# Altium PCB diapers1.PcbDoc
Units mil, origin at the board's own origin, x right, y up, seen from the top; angles counter-clockwise.
Board outline 1011.01 x 1010.52 mil, 2 copper layers (Top Layer, Bottom Layer); 32 components, 19 nets, 115 pads, 51 vias.
Unrouted connection lines stored in the file: 24.
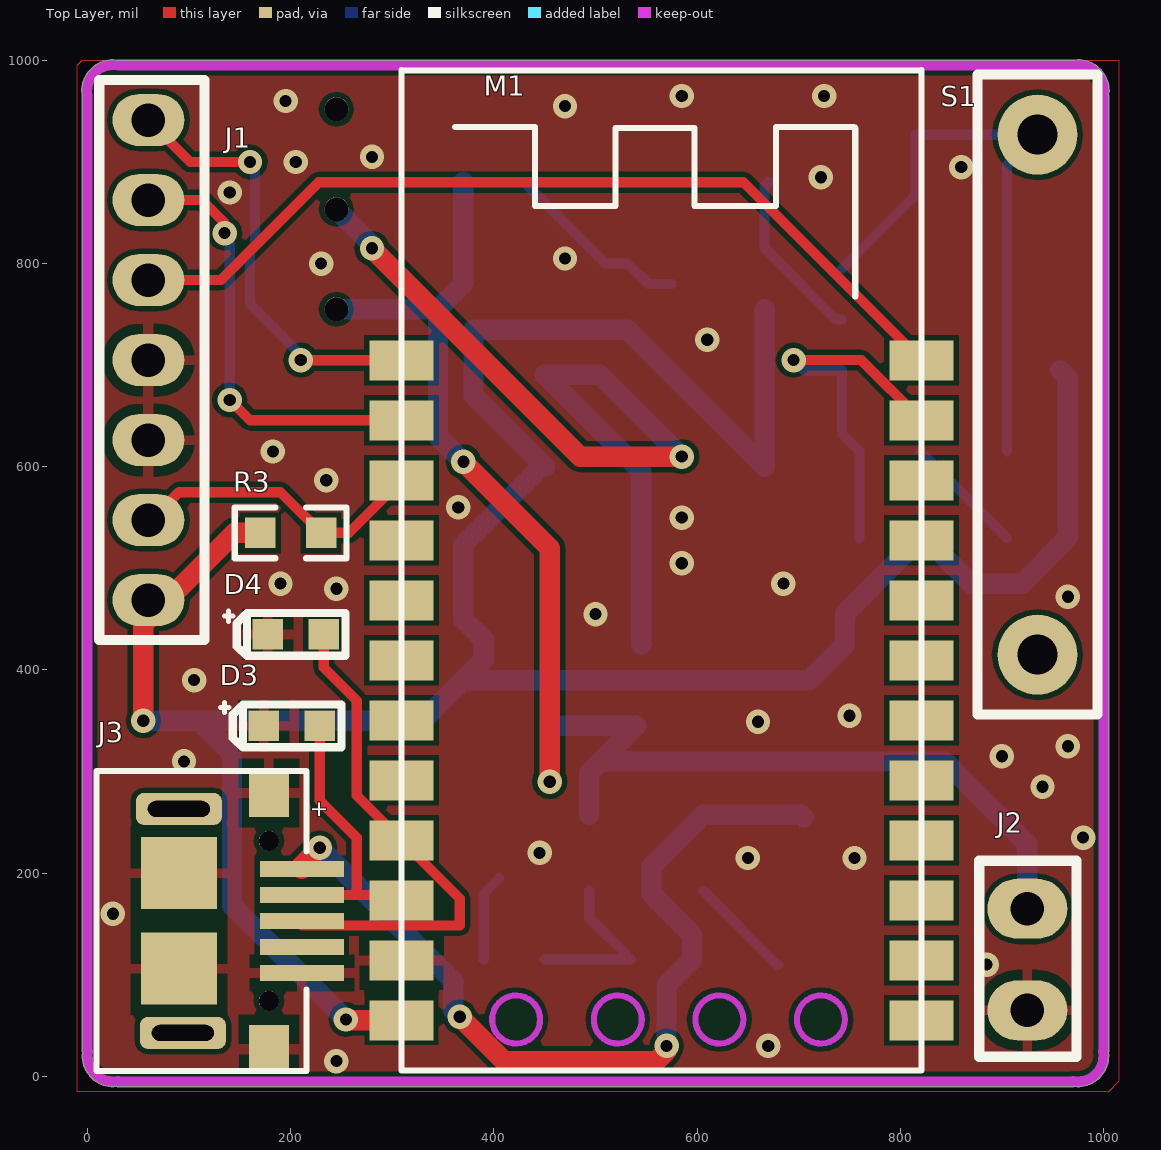
[diagram p0: Top Layer view]
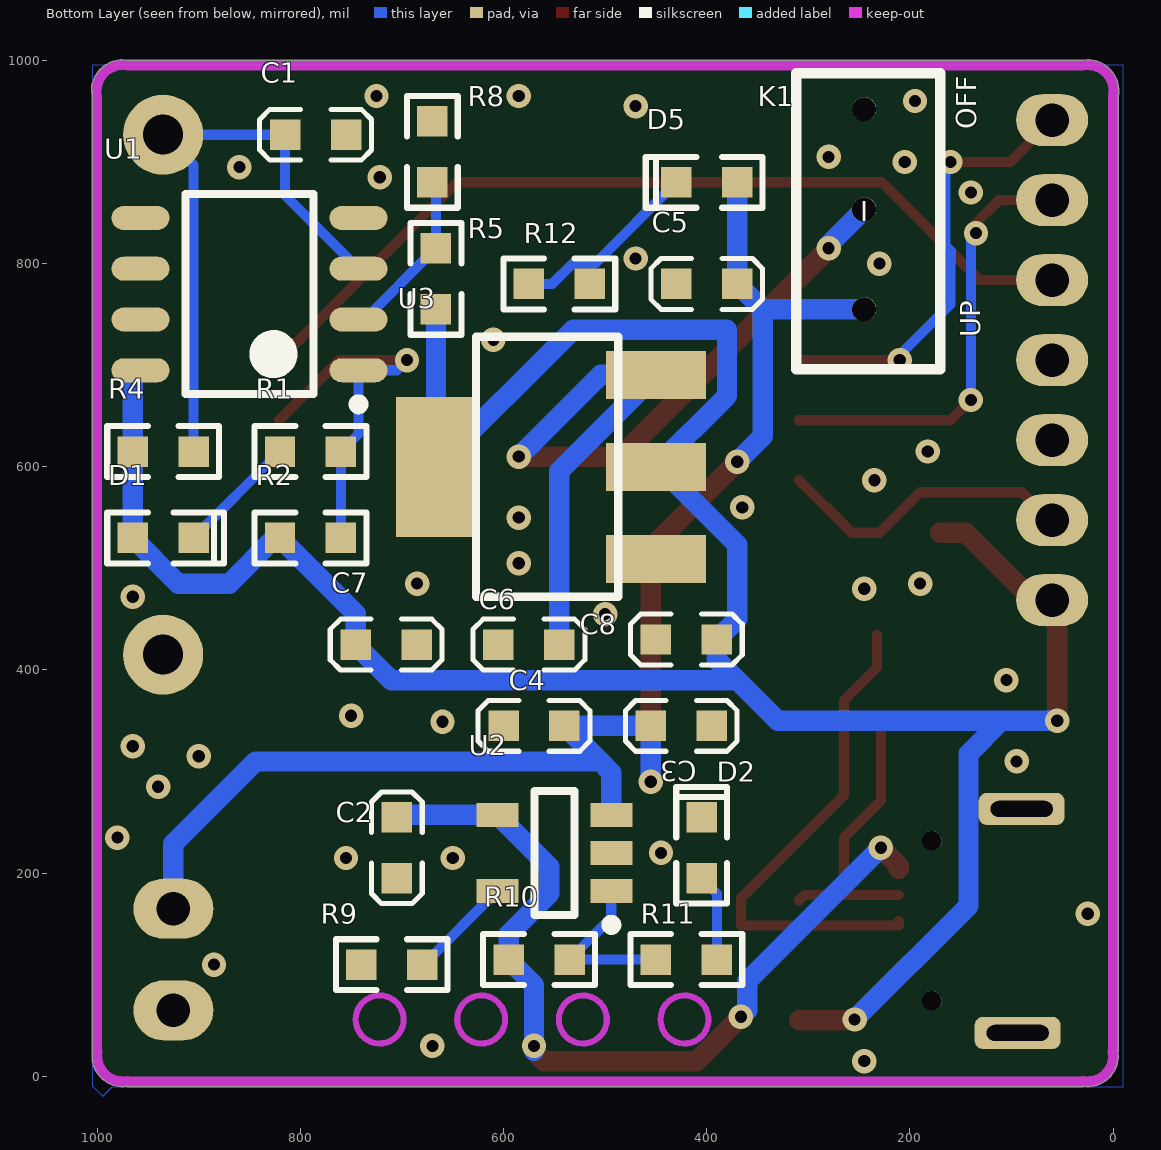
[diagram p1: Bottom Layer view, seen from below]
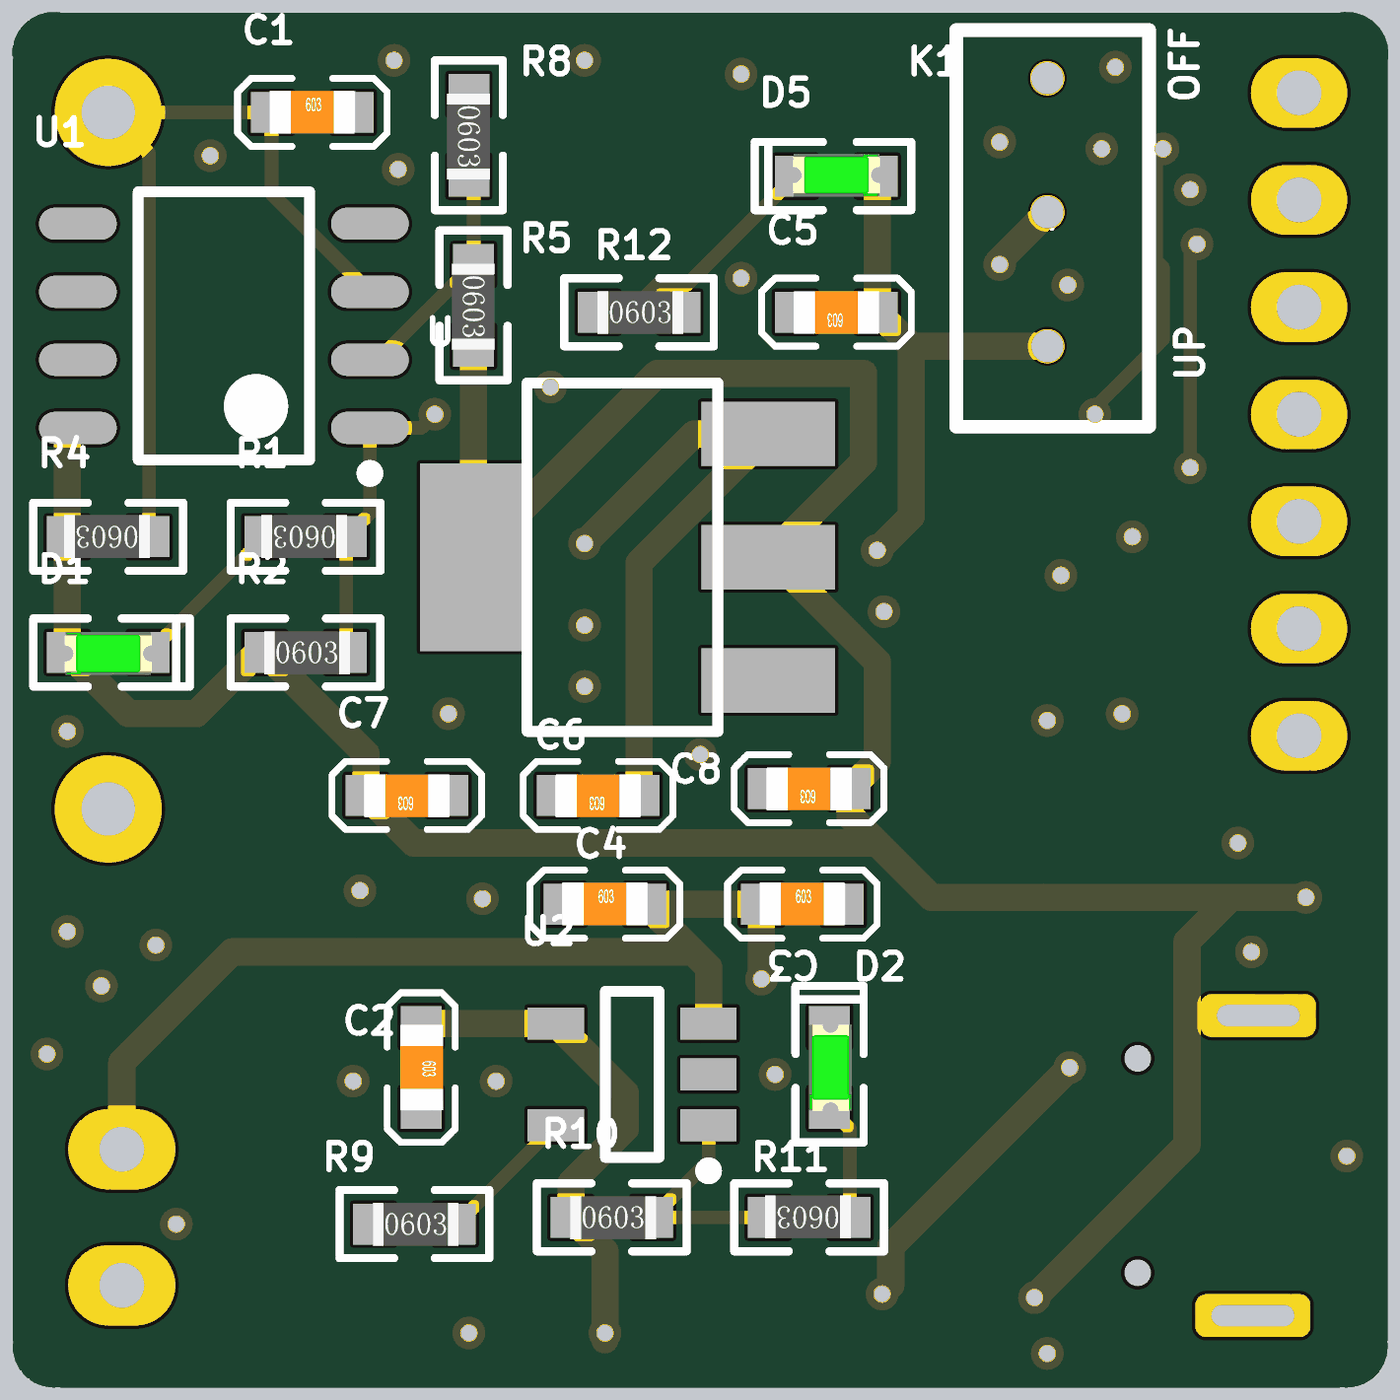
[diagram p2: 3D render of the assembled board from below, using the file's embedded part models]

## Layer stack, top to bottom
Top Solder: solder mask 0.4, Solder Resist, Dk 3.5
Top Layer: signal copper 1.4
Dielectric 1: dielectric 12.6, FR-4, Dk 4.8
Bottom Layer: signal copper 1.4
Bottom Solder: solder mask 0.4, Solder Resist, Dk 3.5

## Board outline
28.56,-9.8 cw(c25,20) -4.8,23.56 cw(c0,25) -5.02,25 -5.02,964.53 cw(c25,970) 30.47,1000.01 969.53,1000.01 cw(c975,970) 1005.51,970 cw(c1000.5,970) 1004.57,967.07 cw(c1000,965) 1005.01,965 1005.01,25 cw(c1000,25) 1004.8,23.56 cw(c975,20) 1005.01,20 cw(c975,20) 971.44,-9.8 cw(c970,-5) 970,-10.01 30,-10.01 cw(c30,-5)

## Design rules (kind name [scope] priority, off if disabled: settings)
Clearance [All] p1: gap=5 ignorepadtopadclearanceinfootprint=FALSE
PolygonConnect PolygonConnect_1 [IsVia] p1: connectstyle=Direct reliefconductorwidth=10 reliefentries=4 polygonreliefangle="90 Angle" airgapwidth=10
PolygonConnect [All] p2: connectstyle=Relief reliefconductorwidth=10 reliefentries=4 polygonreliefangle="90 Angle" airgapwidth=10
RoutingVias [All] p1: holewidth=28 width=50 viastyle="Through Hole" minholewidth=28 minwidth=50 maxholewidth=28 maxwidth=50
SolderMaskExpansion [All] p1: expansion=2.5
Width pow [InNetClass('pow')] p1: maxlimit=60 minlimit=15 preferedwidth=20
Width [All] p2: maxlimit=10 minlimit=10 preferedwidth=10
30 further rules are at their usual default settings.

## Classes and differential pairs
net class pow: +3.3V BT2 VBUS VIN

## Components (designator, comment, footprint, x,y, rotation, side; value= is the part's Value field where it differs from the comment)
C1 "104K50V" C0603 815,926.81 r180 bottom
C2 "475K16V" C0603 705,255 r270 bottom
C3 "106K50V" C0603 455,345 r180 bottom
C4 "104K50V" C0603 600,345 r180 bottom
C5 "106K50V" C0603 370,780 r0 bottom
C6 "104K50V" C0603 545,425 r0 bottom
C7 "106K50V" C0603 685.53,425 r0 bottom
C8 "104K50V" C0603 390,430 r0 bottom
D1 "LED0603G" D-LED0603G 965,530 r180 bottom
D2 "LED0603G" D-LED0603G 405,195 r90 bottom
D3 "ESDA_TR1/0603" HS_0603D 201.06,345 r0 top
D4 "ESDA_TR1/0603" HS_0603D 205,435 r0 top
D5 "LED0603G（NC）" D-LED0603G 370,880 r0 bottom
J1 "J-D2.0-1*7" D-2.0-1*7 60,468.78 r90 top
J2 "J-D2.54-1*2" D2.54-1*2P 925,165 r270 top
J3 "USB-MINI-SOCKET" "MICRO-USB - 5.9" 211.06,204.17 r270 top
K1 "SS-12D00" SS-12D00 245,951.85 r270 bottom
M1 "cc2540" CC25XXSM 565,380 r0 top
R1 "1KF" R0603 760,615 r0 bottom
R2 "10KF" R0603 820,530 r180 bottom
R3 "4.7KF(NC)" R0603 230,535 r180 top
R4 "10KF" R0603 905,615 r0 bottom
R5 "5KF" R0603 666.54,815 r270 bottom
R8 "5KF" R0603 670,940 r270 bottom
R9 "R0603-15KF" R0603 740,110 r180 bottom
R10 "470RF" R0603 595,115 r180 bottom
R11 "470RF" R0603 390,115 r0 bottom
R12 "1KF(NC)" R0603 575,780 r180 bottom
S1 "sw420" sw420 935,926.81 r270 top
U1 "LM393-DR" LM393 850,770 r0 bottom
U2 "MCP73831" SOT23-5N 550,220 r0 bottom
U3 "AMS1117_3.3V" SOT-223 450,600 r90 bottom

## Footprints (in the part's own frame and the unit in brackets; to place one, negate y for a bottom-side part, rotate by r counter-clockwise, add the part's x,y. Pads: shape width x height; smd on the part's side, far side on the other; paste and mask are expansions set on the pad)
C0603 [mil]
  rect 30x30 smd: 1(0,0) 2(60,0)
  silkscreen extent -25,-25 85,25, body extent -1,-15 61,16, height 12
CC25XXSM [mm]
  rect 1.6x1 smd: 1(-6.5,8.25) 2(-6.5,6.75) 3(-6.5,5.25) 4(-6.5,3.75) 5(-6.5,2.25) 6(-6.5,0.75) 7(-6.5,-0.75) 8(-6.5,-2.25) 9(-6.5,-3.75) 10(-6.5,-5.25) 11(-6.5,-6.75) 12(-6.5,-8.25) 13(6.5,-8.25) 14(6.5,-6.75) 15(6.5,-5.25) 16(6.5,-3.75) 17(6.5,-2.25) 18(6.5,-0.75) 19(6.5,0.75) 20(6.5,2.25) 21(6.5,3.75) 22(6.5,5.25) 23(6.5,6.75) 24(6.5,8.25)
  Keep-Out Layer circle w0.152: c-3.635,-8.23 r0.6
  Keep-Out Layer circle w0.152: c-1.095,-8.23 r0.6
  Keep-Out Layer circle w0.152: c1.445,-8.23 r0.6
  Keep-Out Layer circle w0.152: c3.985,-8.23 r0.6
  silkscreen extent -6.5,-9.5 6.5,15.5
D2.54-1*2P [mm]
  oval 1.5x2 hole 0.838: 1(0,0) 2(2.54,0)
  silkscreen extent -1.2,-1.2 3.7,1.23, body extent -1.1,-1.3 3.6,1.24, height 10
D-2.0-1*7 [mm]
  oval 1.3x1.8 hole 0.838: 1(0,0) 1(0,0) 2(2,0) 3(4,0) 4(6,0) 5(8,0) 6(10,0) 7(12,0)
  silkscreen extent -1,-1.4 13,1.23, body extent -1,-1.44 13,1.23, height 10
D-LED0603G [mil]
  rect 30x30 smd: 1(0,0) 2(60,0)
  silkscreen extent -25,-25 90,25, body extent -2,-16 62,15, height 24
HS_0603D [mil]
  rect 30x30 smd: 1(-27.5,0) 2(27.5,0)
  silkscreen extent -70,-21 49,23
LM393 [mm] "SOP, 8-Leads, Body 4.90x3.90mm, Pitch 1.27mm, IPC Medium Density"
  oval 1.45x0.6 smd: 1(-2.725,1.905) 2(-2.725,0.635) 3(-2.725,-0.635) 4(-2.725,-1.905) 5(2.725,-1.905) 6(2.725,-0.635) 7(2.725,0.635) 8(2.725,1.905)
  silkscreen extent -2.85,-2.5 1.6,2.88, body extent -2,-2.5 2,2.5, height 1.75
"MICRO-USB - 5.9" [mm]
  rrect50% 0.8x2.15 hole 0.4 slot 1.55 at 90 deg: 0(-1.5,-3.075) 0(4.1,-2.975)
  rect 0.4x2.1 smd: 1(0,0) 2(0.65,0) 3(1.3,0) 4(1.95,0) 5(2.6,0)
  rect 1.2x1 smd: 6(-1.9,-0.825) 7(4.5,-0.825)
  rect 1.8x1.9 smd: 8(0.106,-3.075) 9(2.493,-3.075)
  round 0.5 hole 0.5 unplated: ""(-0.7,-0.825) ""(3.3,-0.825)
  silkscreen extent -2.45,-5.13 5.05,0.12
R0603 [mil]
  rect 30x30 smd: 1(0,0) 2(60,0)
  silkscreen extent -25,-25 85,25, body extent 0,-16 62,15, height 18
SOT23-5N [mm] "SOT23, 5-Leads, Body 2.90x2.70mm, Pitch 0.95mm, IPC Medium Density"
  rect 1.05x0.6 smd: 1(-1.425,0.95) 2(-1.425,0) 3(-1.425,-0.95) 4(1.425,-0.95) 5(1.425,0.95)
  silkscreen extent -1.55,-1.55 0.5,1.92, body extent -0.9,-1.55 0.9,1.55, height 1.45
SOT-223 [mm]
  rect 1.2x2.5 smd: 1(-2.3,0) 2(0,0) 3(2.3,0)
  rect 3.5x2 smd: 2(0,5.5)
  silkscreen extent -3.25,0.94 3.25,4.5
SS-12D00 [mm] "SS-12D00(1P2T) 立式 柄高5MM"
  round 0.6 hole 0.6: 1(0,0) 2(2.5,0) 3(5,0)
  silkscreen extent -0.9,-1.7 6.5,1.9
sw420 [mm] "常闭型 振动开关SW-420 高灵敏震动开关2708全方位感应传感器"
  round 2 hole 1: 1(0,0) 2(13,0)
  silkscreen extent -1.5,-1.5 14.5,1.5

## Part data
C1 C4 C6 C8: library part C0603X7R-104K50V, "贴片电容-陶瓷", =无编码, 规格型号=100nF±10%_50V_X
C2: library part C0603X7R-475K16V, "贴片电容-陶瓷", =ÎÞ±àÂ, 规格型号=4.7uF±10%_16V_X
C3 C5 C7: library part C0603X7R-106K50V, "贴片电容-陶瓷", =无编码, 规格型号=10uF±10%_50V_X
D1 D2 D5: library part DLED-0603-G, "贴片二极管-LED", 规格型号=0603
D3 D4: library part "D Zener", "Zener Diode"
J1: library part J-D2.0-1*7单排
J2: library part J-D2.54-1*2单排
J3: library part J-USB-MINI-SOCKET, "USB-A卧式插座"
K1: library part "SS-12D00(1P2T) 立式 柄高5MM"
R1 R12: library part R0603-1KF, "贴片电阻-通用", 规格型号=1K±1%_1/10W_±20
R2 R4 R5 R8: library part R0603-10KF, "贴片电阻-通用", 规格型号=10K±1%_1/10W_±20
R3: library part R0603-4.7KF, "贴片电阻-通用", 规格型号=4.7K±1%_1/10W_±20
R9: "贴片电容-通用"
R10 R11: library part R0603-470RF, "贴片电阻-通用", 规格型号=470R±1%_1/10W_±20
S1: "常闭振动传感器"
U1: "双路比较器"
U2: "charge IC"
U3: library part AMS1117-3.3V

## Via types
v1: diameter 24, hole 12, Top Layer to Bottom Layer, tented both sides, 51 vias

## Nets (pads, with @x,y where several pads share a name; then routed paths per layer and width w, separated by ;. In a path a pad name is that pad's centre, name@x,y a point inside that pad or via, vN(x,y) a via of type N, cw(c..) or ccw(c..) an arc to the next point about the centre after c; other vN are vias at no path point)
+3.3V: C7.2 C8.1 D1.1 J1.1 M1.12 R2.1 R3.2 R4.2 R5.2 U1.8 U3.2 | length 2787.2
  Top Layer w20: v1(55,350) 55,445 145,535 R3.2 ; v1(254.39,56) 255.2,55.2 M1.12
  Bottom Layer w20: v1(55,350) 110,350 ; v1(254.39,56) 142.32,168.07 142.32,317.68 110,350 ; R5.2 666.54,600 531.54,735 380,735 380,670 450,600 446.5,600 370,523.5 370,450 C8.1 390,410 370,390 ; U1.8 965,687.28 R4.2 D1.1 920,485 870,485 825,530 R2.1 745.53,455.53 C7.2 710.53,390 370,390 ; 110,350 330,350 370,390
BT2: C3.1 C4.2 C5.1 D5.1 J2.1 K1.3 U2.3 | length 1510.1
  Top Layer w20: v1(370,605) 455,520 v1(455,290)
  Bottom Layer w20: K1.3 345,755 ; v1(370,605) 345,630 345,755 ; D5.1 C5.1 345,755 ; v1(455,290) C3.1 C4.2 505,310 ; U2.3 493.9,298.9 505,310 ; J2.1 925,228.9 843.9,310 505,310
D0: M1.23 R1.1 R2.2 U1.1 | length 374.5
  Top Layer w10: v1(695,705) 761.65,705 M1.23
  Bottom Layer w10: v1(695,705) 705,695 U1.1 742.72,632.28 R1.1 R2.2
DC: J1.6 M1.2 | length 438
  Top Layer w10: J1.6 112.52,862.48 135,840 v1(135,830) ; v1(140,665.75) 160,645.75 M1.2
  Bottom Layer w10: v1(135,830) 140,825 v1(140,665.75)
DD: J1.7 M1.1 | length 436.1
  Top Layer w10: J1.7 101.22,900 v1(160,900) ; v1(210,705) 210.2,704.8 M1.1
  Bottom Layer w10: v1(160,900) 165,895 165,817.57 160,812.57 160,760 210,710 v1(210,705)
DHT12: J1.2 M1.3 R3.1 | length 304.5
  Top Layer w10: J1.2@55,545 60,545 90,575 190,575 R3.1 257.4,535 M1.3
GND: C1.2 C2.2 C3.2 C4.1 C5.2 C6.2 C7.1 C8.2 D2.2 D3.1 D4.1 J1.3 J1.4 J2.2 J3.5 J3.6 J3.7 J3.8 J3.9 M1.11 R8.1 R9.1 R12.2 U1.4 U2.2 U3.1
  other v1: 245,15 670,30 885,110 25,160 650,215 755,215 445,220 980,235 940,285 95,310 900,315 965,325 660,349.04 750,355 105,390 500,455 965,472.05 245,480 190,485 685,485 585,505 585,550 365,560 235,586.69 182.5,615 610,725 230,800 470,805 140,870 721.91,885 860,895 205,900 280,905 470,955 195,960 585,965 725,965
NetC1_1: C1.1 R4.1 S1.1 U1.3 | length 606
  Bottom Layer w10: U1.3 815,867.28 C1.1 S1.1 905,896.81 R4.1
NetD1_2: D1.2 R1.2 | length 120.2
  Bottom Layer w10: R1.2 D1.2
NetD2_1: D2.1 R11.1 | length 86.2
  Bottom Layer w10: R11.1 390,180 D2.1
NetD5_2: D5.2 R12.1 | length 186.4
  Bottom Layer w10: D5.2 510,800 532.07,800 552.07,780 R12.1
NetR5_1: R5.1 R8.2 U1.2 | length 171.6
  Bottom Layer w10: R8.2 666.54,876.54 R5.1 736.54,745 U1.2
NetR9_2: R9.2 U2.5 | length 104
  Bottom Layer w10: U2.5 678.7,110 R9.2
NetR10_2: R10.2 R11.2 U2.1 | length 169.6
  Bottom Layer w10: R11.2 R10.2 493.9,156.1 U2.1
RESET: J1.5 M1.24 | length 873.3
  Top Layer w10: J1.5 131.24,783.74 227.5,880 645.71,880 M1.24
USB_M/SDA: D3.2 J3.2 M1.10 | length 281.7
  Top Layer w10: J3.2 265,178.57 ; D3.2 228.56,271.44 265,235 265,178.57 ; M1.10 303.83,178.57 265,178.57
USB_P/SCL: D4.2 J3.3 M1.9 | length 501.5
  Top Layer w10: J3.3 211.06,148.62 366.38,148.62 366.38,175.08 M1.9 265,276.46 265,370 232.5,402.5 D4.2
VBUS: C2.1 J3.1 R10.1 U2.4 | length 862.8
  Top Layer w20: J3.1 211.06,207.5 v1(228.56,225) ; v1(366.38,58.62) 410,15 560,15 570,25 v1(570,30)
  Bottom Layer w20: v1(228.56,225) 360,93.56 360,65 v1(366.38,58.62) ; v1@570,25 v1(570,30) 570,90 R10.1 595,140.01 555,180.01 555,206.3 U2.4 702.6,257.4 C2.1
VIN: C6.1 K1.2 U3.3 | length 916.1
  Top Layer w20: v1(280,815) 485,610 v1(585,610)
  Bottom Layer w20: K1.2 280,818.43 v1(280,815) ; C6.1 545,595.55 U3.3 504.45,690.55 v1(585,610)
pads on no net: J3. J3.0 J3.4 K1.1 M1.4 M1.5 M1.6 M1.7 M1.8 M1.13 M1.14 M1.15 M1.16 M1.17 M1.18 M1.19 M1.20 M1.21 M1.22 S1.2 U1.5 U1.6 U1.7

## Polygon pours and split planes (outlines as drawn)
no net on Top Layer "Top Layer-No Net 5" (solid, shelved, pour order 24): -5,1000 1015,1000 1015,-5 1005,-15 -10,-15 -10,995
no net on Top Layer "NONET_L01_P026" (solid, pour order 26): -85,870
GND on Top Layer "Top Layer-No Net 2" (solid, remove dead copper, pour order 12): -0.17,1006.2 4.83,1001.2 1004.35,1001.2 1004.35,-8.32 1009.83,-13.8 -5.17,-13.8 -5.17,996.2 -0.17,1001.2
no net on Top Layer "Top Layer-No Net 3" (solid, pour order 16): -70,910
no net on Top Layer "Top Layer-No Net 4" (solid, pour order 14): -80,935
no net on Top Layer "Top Layer-No Net" (solid, pour order 2): -95,525
no net on Bottom Layer "Bottom Layer-No Net 3" (solid, pour order 22): -75,835
GND on Bottom Layer "Bottom Layer-No Net 2" (solid, remove dead copper, pour order 18): -10,995 1005,995 1005,-9.03 994.51,-19.51 985,-10 -10,-10
no net on Bottom Layer "Bottom Layer-No Net" (solid, pour order 10): 175,855

## Keep-outs
Keep-Out Layer:
  lines w10: 0,25 0,965 cw(c25,970) 30,995 970,995 cw(c975,970) 1000.5,970 ; 0.49,24.9 ccw(c25,20) 29.9,-4.51 ; 30,-5 970,-5 ; 970.1,-4.51 ccw(c975,20) 999.51,24.9 ; 1000,25 1000,965

## Dimensions
995,1110 to 5,1095 on Mechanical 1
-95,990 to -240,0 on Mechanical 1

## Text inside footprints (layer, text, board x,y; h text height)
J3: Top Overlay "+" at 221,271.62 h15.75 r270
K1: Bottom Overlay "OFF" at 134.76,932.17 h19.68 r270; Bottom Overlay "I" at 248.94,841.61 h19.68; Bottom Overlay "UP" at 130.83,727.44 h19.68 r270